# EAGLE board APM2_Adapter (EAGLE 6.1)
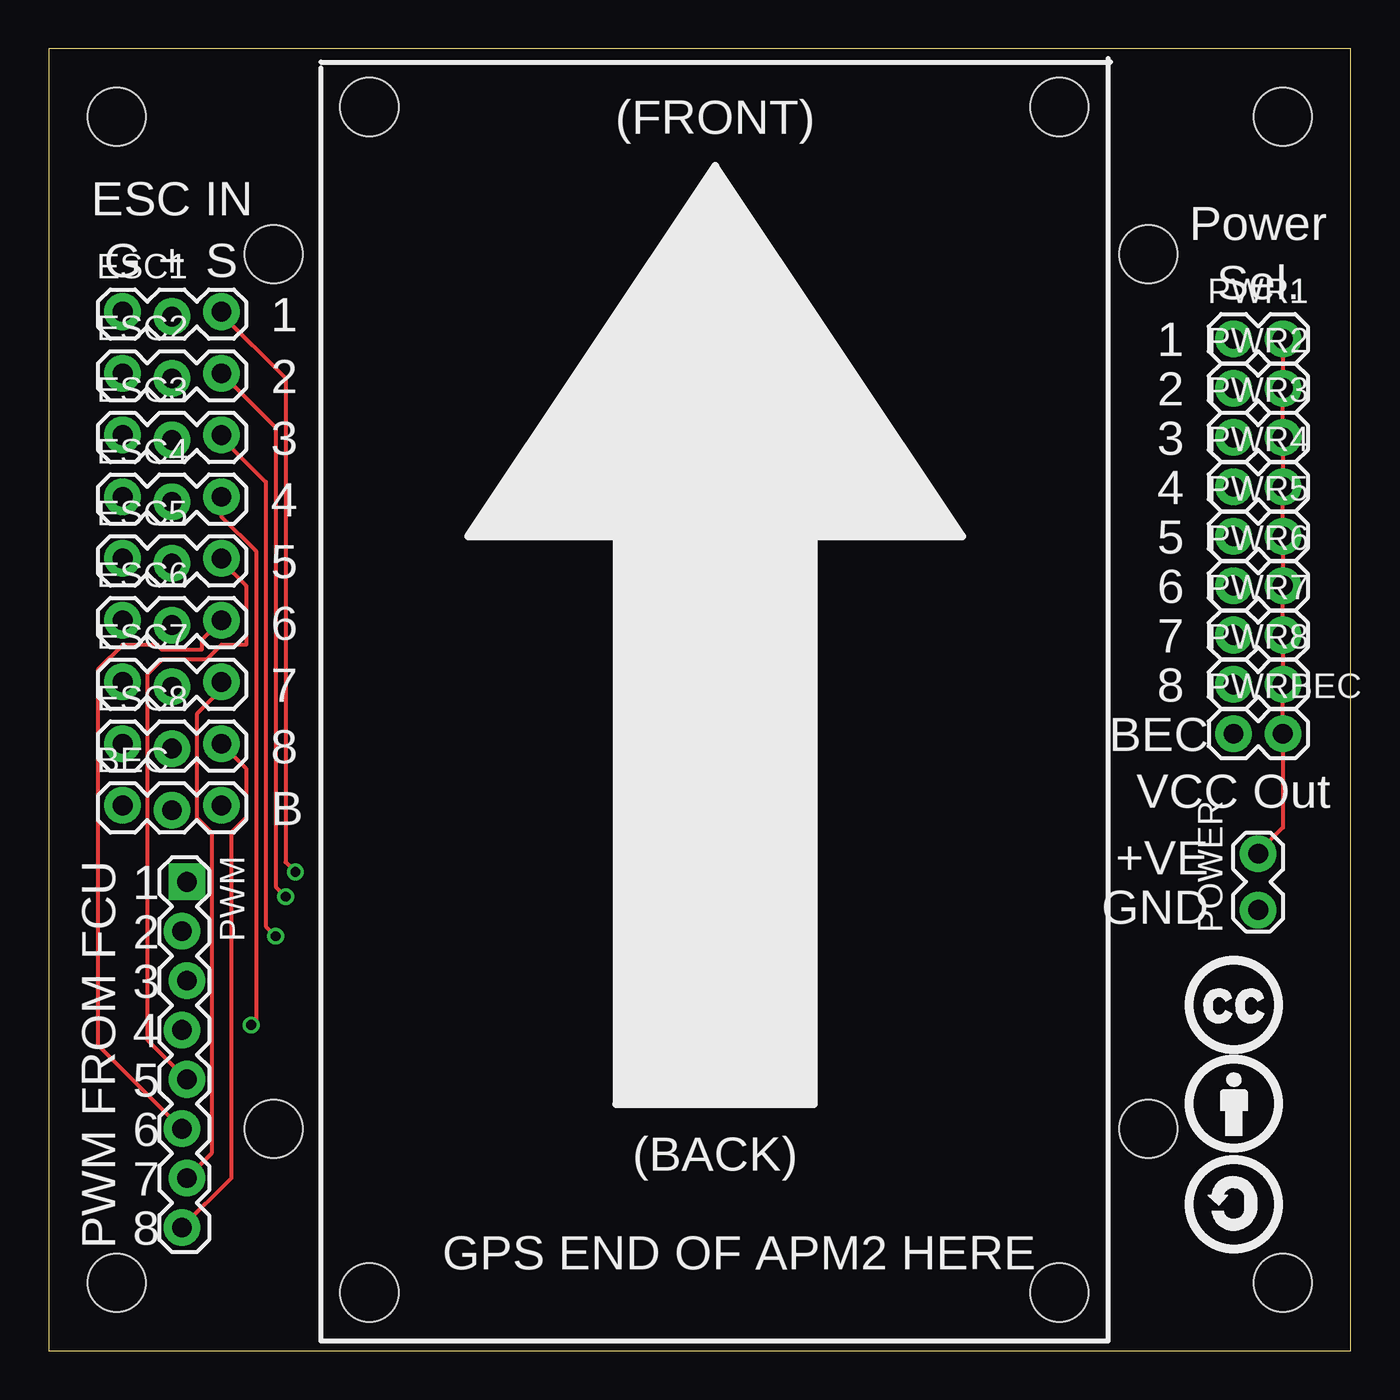
[diagram p0: board, top side]
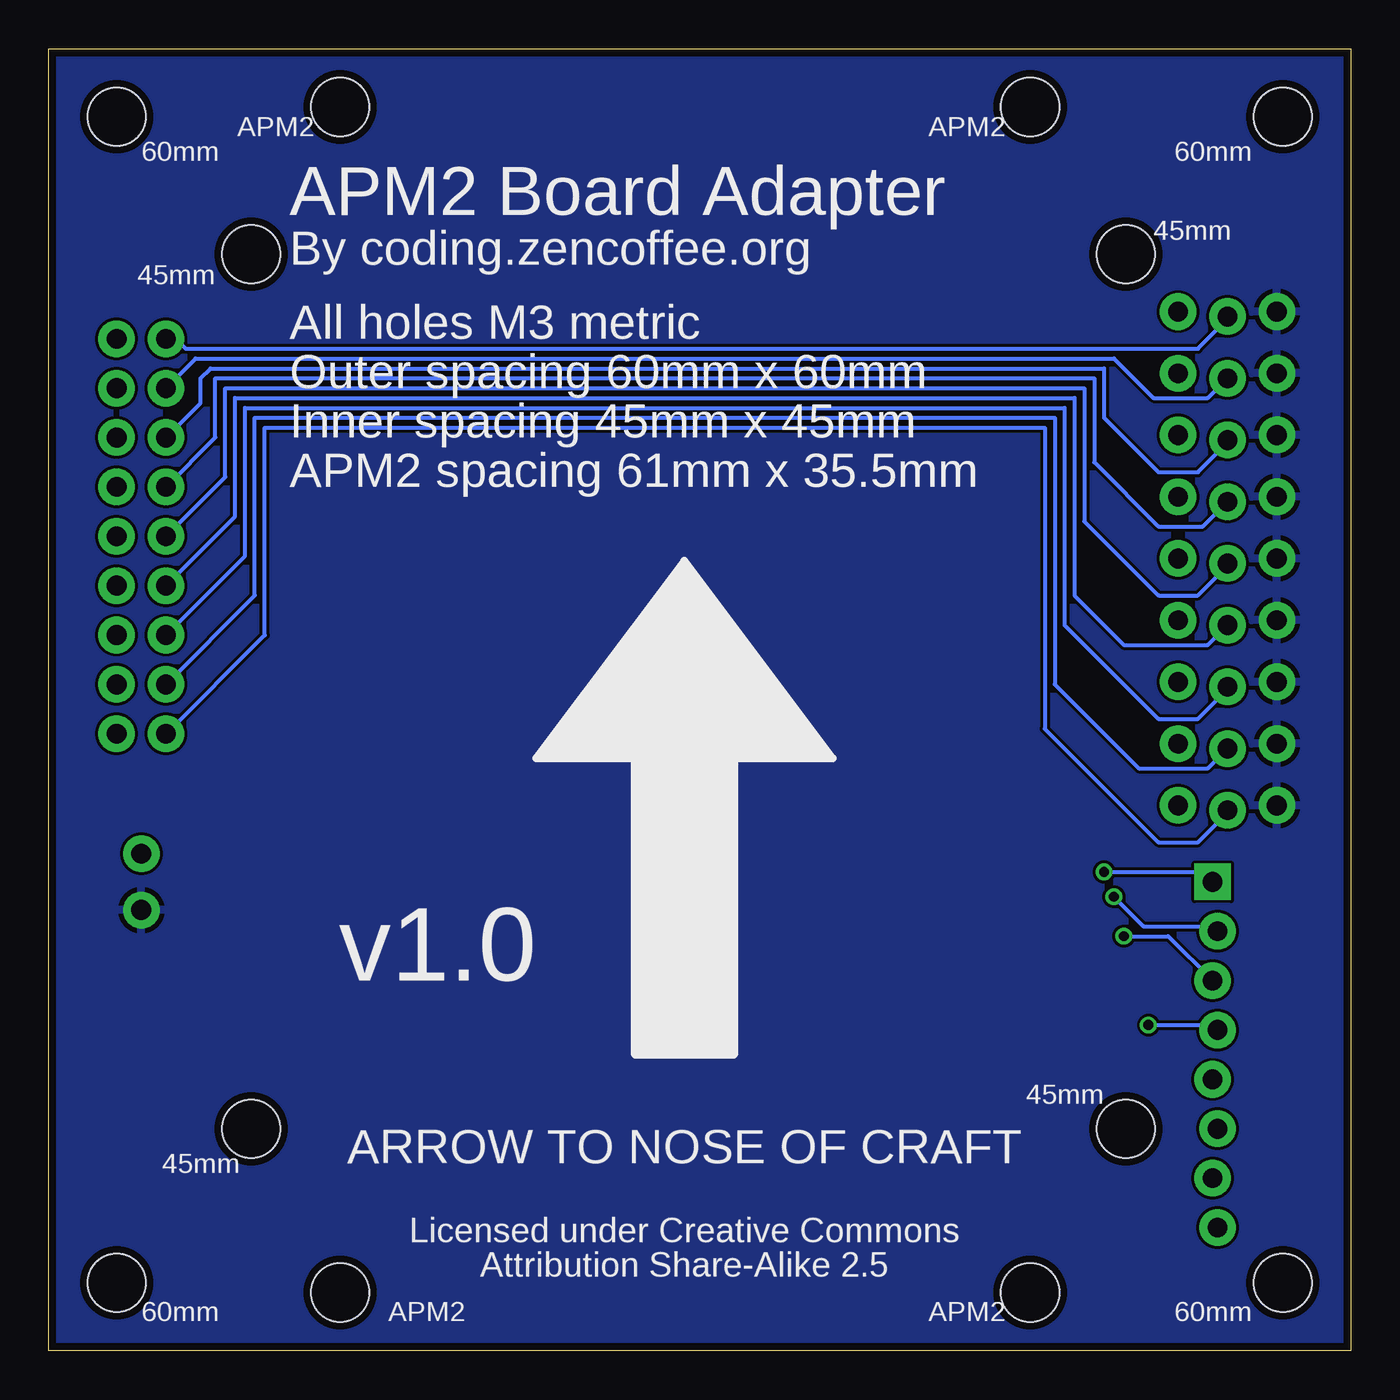
[diagram p1: board, bottom side, seen from below]

Size 67 x 67 mm. Coordinates in mm from the lower left corner, seen from the top.
Outline: 0,0 67,0 67,67 0,67 0,0
Copper layers (1*16): Top 0.0356mm / dielectric 1.5011mm / Bottom 0.0356mm
Design rules: minimum track width 6mil, minimum drill 13mil, track to track 6mil, track to pad 6mil, pad to pad 6mil, via to via 6mil, smd to smd 6mil, copper to edge 15mil, drill to drill 6mil, minimum pad ring 7mil, minimum via ring 7mil, stop-mask expansion 4mil, vias tented up to drill 0mil, thermal gap 10mil
Holes 3 mm at 3.5,3.5 3.5,63.5 63.5,63.5 63.5,3.5 16.5,3 52,3 16.5,64 52,64 11.58,11.43 56.58,11.43 11.58,56.43 56.58,56.43
tRestrict: area 14,0.6 to 54.6,66.7

## Footprints (pad centres in the part's own frame; a part is rotated, then mirrored left to right if it is on the bottom)
1X03_LOCK = drill 1.016 pad 1.88: 1 0,0.127; 2 2.54,-0.127; 3 5.08,0.127
1X02_LOCK = drill 1.016 pad 1.88: 1 -0.178,0; 2 2.718,0
1X08_LOCK = drill 1.016 pad 1.88 square: 1 0,0.127 | drill 1.016 pad 1.88: 2 2.54,-0.127; 3 5.08,0.127; 4 7.62,-0.127; 5 10.16,0.127; 6 12.7,-0.127; 7 15.24,0.127; 8 17.78,-0.127
1X02 = drill 1.016 pad 1.88: 1 0,0; 2 2.54,0

## Placement (x,y rotation side)
BEC  [1X03_LOCK]  3.81,27.94 0 top
ESC1  [1X03_LOCK]  3.81,53.34 0 top
ESC2  [1X03_LOCK]  3.81,50.16 0 top
ESC3  [1X03_LOCK]  3.81,46.99 0 top
ESC4  [1X03_LOCK]  3.81,43.81 0 top
ESC5  [1X03_LOCK]  3.81,40.64 0 top
ESC6  [1X03_LOCK]  3.81,37.47 0 top
ESC7  [1X03_LOCK]  3.81,34.29 0 top
ESC8  [1X03_LOCK]  3.81,31.11 0 top
POWER  [1X02_LOCK]  62.23,22.86 90 top
PWM  [1X08_LOCK]  6.99,24.13 270 top
PWR1  [1X02]  60.96,52.07 0 top
PWR2  [1X02]  60.96,49.53 0 top
PWR3  [1X02]  60.96,46.99 0 top
PWR4  [1X02]  60.96,44.45 0 top
PWR5  [1X02]  60.96,41.91 0 top
PWR6  [1X02]  60.96,39.37 0 top
PWR7  [1X02]  60.96,36.83 0 top
PWR8  [1X02]  60.96,34.29 0 top
PWRBEC  [1X02]  60.96,31.75 0 top
U$1  [CC]  58.42,15.24 0 top
U$2  [BY]  58.42,10.16 0 top
U$3  [SA]  58.42,5.08 0 top

## Library data of the parts
BEC ESC1-ESC8 POWER PWM PWR1-PWR8 PWRBEC = SparkFun
U$1-U$3 = zencoding

## Nets
GND: BEC.1 ESC1.1 ESC2.1 ESC3.1 ESC4.1 ESC5.1 ESC6.1 ESC7.1 ESC8.1 POWER.1
N$2: ESC1.3 PWM.1
N$3: ESC2.3 PWM.2
N$4: ESC3.3 PWM.3
N$5: ESC4.3 PWM.4
N$6: ESC5.3 PWM.5
N$7: ESC6.3 PWM.6
N$8: ESC7.3 PWM.7
N$9: ESC8.3 PWM.8
N$10: ESC2.2 PWR2.1
N$12: ESC1.2 PWR1.1
N$13: ESC3.2 PWR3.1
N$14: ESC4.2 PWR4.1
N$15: ESC5.2 PWR5.1
N$16: ESC6.2 PWR6.1
N$17: ESC7.2 PWR7.1
N$18: ESC8.2 PWR8.1
N$19: BEC.2 PWRBEC.1
VCC: POWER.2 PWR1.2 PWR2.2 PWR3.2 PWR4.2 PWR5.2 PWR6.2 PWR7.2 PWR8.2 PWRBEC.2

## Tracks (layer width: path | path; a pad name or v marks a point on that pad's centre or on a via)
GND
  pour Bottom: 0.5,66.5 66.5,66.5 66.5,0.5 0.5,0.5
N$2  (via drill 0.51)
  Top 0.203: v12.7,24.64 12.19,25.15 12.19,50.04 8.89,53.34 ESC1.3
  Bottom 0.203: PWM.1 7.62,24.64 v12.7,24.64
N$3  (via drill 0.51)
  Top 0.203: v12.19,23.37 11.68,23.88 11.68,47.5 ESC2.3
  Bottom 0.203: PWM.2 7.11,21.84 10.67,21.84 v12.19,23.37
N$4  (via drill 0.51)
  Top 0.203: v11.68,21.34 11.18,21.84 11.18,44.7 8.89,46.99 ESC3.3
  Bottom 0.203: PWM.3 9.4,21.34 v11.68,21.34
N$5  (via drill 0.51)
  Top 0.203: v10.41,16.76 10.67,17.02 10.67,41.15 8.89,42.93 ESC4.3
  Bottom 0.203: PWM.4 7.11,16.76 v10.41,16.76
N$6
  Top 0.203: PWM.5 5.08,16 5.08,34.8 5.84,35.56 8.13,35.56 8.89,36.32 10.16,36.32 10.16,39.37 8.89,40.64 ESC5.3
N$7
  Top 0.203: PWM.6 2.54,15.75 2.54,35.05 3.81,36.32 5.59,36.32 5.84,36.07 7.87,36.07 7.87,36.58 ESC6.3
N$8
  Top 0.203: PWM.7 8.38,10.16 8.38,26.67 7.62,27.43 7.62,32.77 8.89,34.04 ESC7.3
N$9
  Top 0.203: PWM.8 9.4,8.89 9.4,26.67 10.16,27.43 10.16,29.97 ESC8.3
N$10
  Bottom 0.203: ESC2.2 7.37,49.02 10.16,49.02 12.19,51.05 59.44,51.05 PWR2.1
N$12
  Bottom 0.203: PWR1.1 60.45,52.07 59.94,51.56 7.87,51.56 6.35,53.09 ESC1.2
N$13
  Bottom 0.203: PWR3.1 59.18,48.77 59.18,50.04 58.67,50.55 12.7,50.55 12.7,48.01 9.91,45.21 7.87,45.21 6.35,46.74 ESC3.2
N$14
  Bottom 0.203: ESC4.2 7.62,42.42 9.91,42.42 13.21,45.72 13.21,50.04 58.42,50.04 58.42,46.99 PWR4.1
N$15
  Bottom 0.203: PWR5.1 57.91,44.96 57.91,49.53 13.72,49.53 13.72,42.67 9.91,38.86 7.87,38.86 6.35,40.39 ESC5.2
N$16
  Bottom 0.203: ESC6.2 7.37,36.32 11.68,36.32 14.22,38.86 14.22,49.02 57.4,49.02 57.4,42.93 PWR6.1
N$17
  Bottom 0.203: PWR7.1 56.9,40.89 56.9,48.51 14.73,48.51 14.73,37.34 9.91,32.51 7.87,32.51 6.35,34.04 ESC7.2
N$18
  Bottom 0.203: ESC8.2 7.37,29.97 10.92,29.97 15.24,34.29 15.24,48.01 56.39,48.01 56.39,38.86 PWR8.1
N$19
  Bottom 0.203: PWRBEC.1 55.88,36.83 55.88,47.5 15.75,47.5 15.75,32 9.91,26.16 7.87,26.16 6.35,27.69 BEC.2
VCC
  Top 0.203: PWR1.2 PWR2.2 PWR3.2 PWR4.2 PWR5.2 PWR6.2 PWR7.2 PWR8.2 PWRBEC.2 63.5,26.92 62.23,25.65 POWER.2

## Text on the board
tPlace: (FRONT) | ESC IN | Power | Sel. | G | + | S | 1 | 1 | 2 | 2 | 3 | 3 | 4 | 4 | 5 | 5 | 6 | 6 | 7 | 7 | 8 | BEC | 8 | B | VCC Out | +VE | 1 | GND | 2 | 3 | 4 | PWM FROM FCU | 5 | 6 | (BACK) | 7 | 8 | GPS END OF APM2 HERE
bPlace: APM2 | APM2 | 60mm | 60mm | APM2 Board Adapter | 45mm | By coding.zencoffee.org | 45mm | All holes M3 metric | Outer spacing 60mm x 60mm | Inner spacing 45mm x 45mm | APM2 spacing 61mm x 35.5mm | v1.0 | 45mm | ARROW TO NOSE OF CRAFT | 45mm | Licensed under Creative Commons | Attribution Share-Alike 2.5 | 60mm | APM2 | APM2 | 60mm